# Altium PCB WEMOSD1R1_MATRIX64X32_RGB.PcbDoc
Units mil, origin at the board's own origin, x right, y up, seen from the top; angles counter-clockwise.
Board outline 2677.69 x 1693.44 mil, 2 copper layers (Top Layer, Bottom Layer); 6 components, 18 nets, 71 pads, 0 vias.
Unrouted connection lines stored in the file: 22.
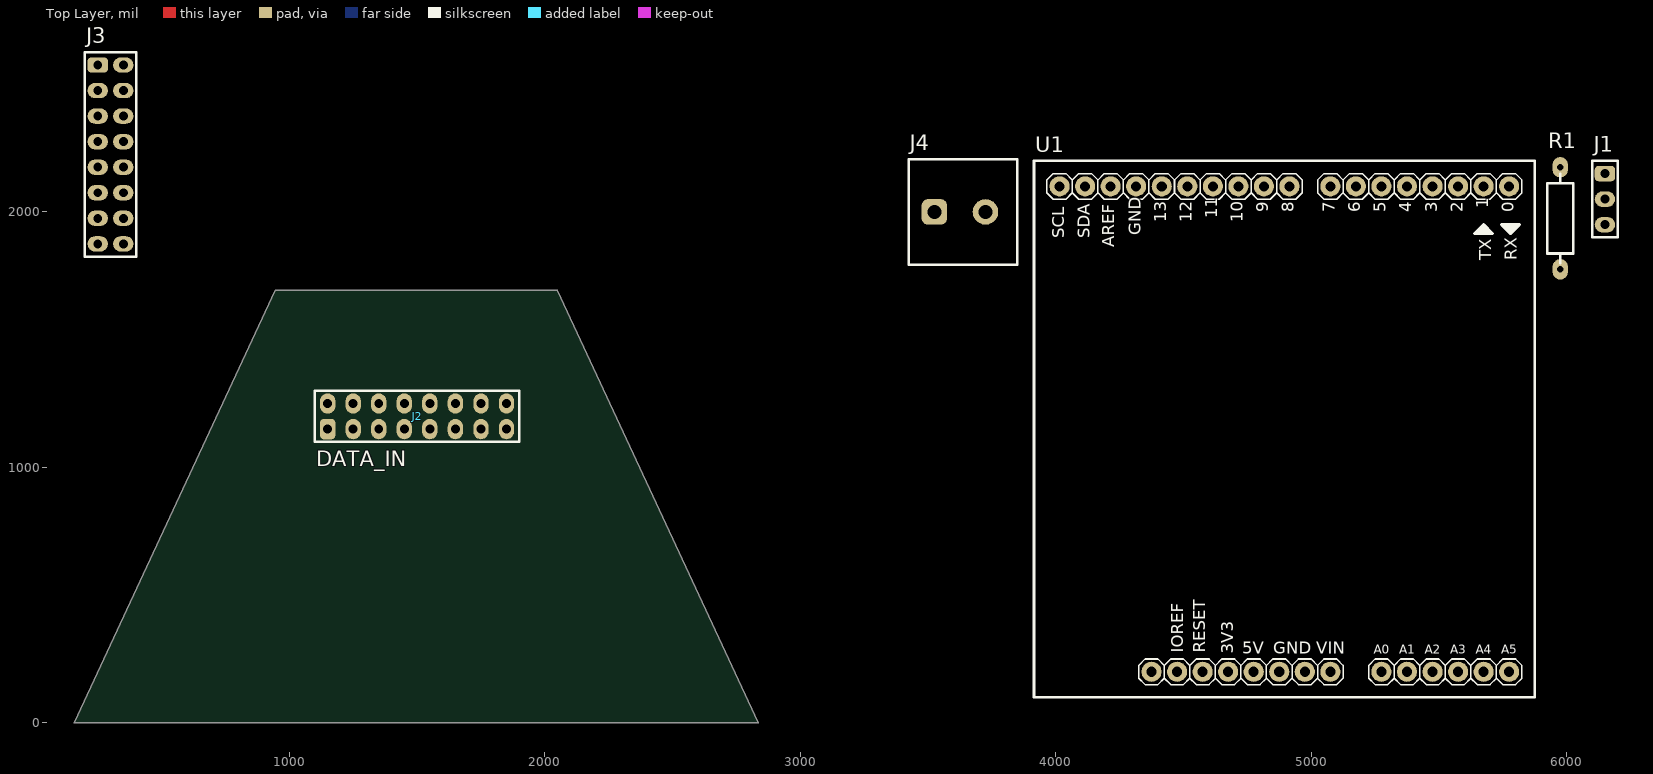
[diagram p0: Top Layer view]
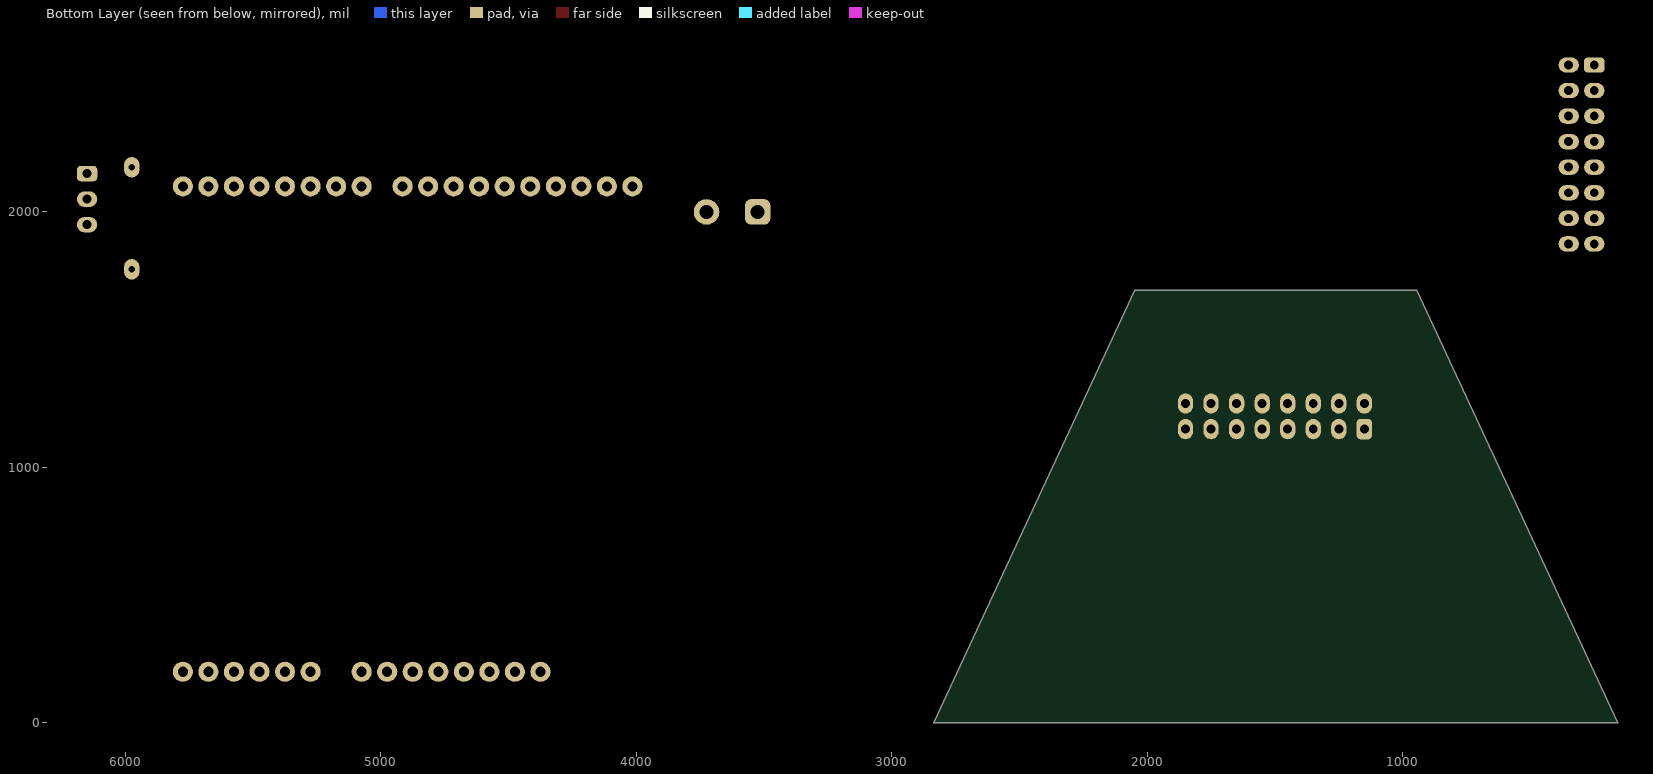
[diagram p1: Bottom Layer view, seen from below]

## Layer stack, top to bottom
Top Solder: solder mask 0.4, Solder Resist, Dk 3.5
Top Layer: signal copper 1.4
Dielectric 1: dielectric 12.6, FR-4, Dk 4.8
Bottom Layer: signal copper 1.4
Bottom Solder: solder mask 0.4, Solder Resist, Dk 3.5

## Board outline
158.13,0.36 ccw(c158.37,0.25) 158.37,-0.01 2835.54,-0.01 ccw(c2835.54,0.25) 2835.8,0.25 ccw(c2835.54,0.25) 2835.78,0.36 2048.38,1693.28 ccw(c2048.14,1693.16) 2048.14,1693.43 945.78,1693.43 ccw(c945.78,1693.16) 945.54,1693.28

## Design rules (kind name [scope] priority, off if disabled: settings)
Clearance [All] p1: gap=10 ignorepadtopadclearanceinfootprint=FALSE except(0: Arc-Hole Track-Hole SMDPad-Hole THPad-Hole Via-Hole Fill-Hole Poly-Hole Region-Hole Text-Hole)
PolygonConnect [All] p1: connectstyle=Relief reliefconductorwidth=10 reliefentries=4 polygonreliefangle="90 Angle" airgapwidth=10
RoutingVias [All] p1: holewidth=28 width=50 viastyle="Through Hole" minholewidth=28 minwidth=50 maxholewidth=28 maxwidth=50
SolderMaskExpansion [All] p1: expansion=4 istentingtop=FALSE
Width [All] p1: maxlimit=10 minlimit=10 preferedwidth=10
30 further rules are at their usual default settings.

## Components (designator, comment, footprint, x,y, rotation, side; value= is the part's Value field where it differs from the comment)
J1 "DTH11" "Header 3x1 TH Pitch 2.54mm" 6150,2050 r0 top
J2 "DATA_IN" "Header 8x2 TH Pitch 2.54mm" 1500,1200 r90 top
J3 "DATA_OUT" "Header 8x2 TH Pitch 2.54mm" 300,2225 r0 top
J4 "KF28_2" HEADER_KF128_2_5.08MM 3625,2000 r0 top
R1 "10K" RES-0.25W-H-MF 5975,1975 r90 top
U1 "ArduinoUno" ARDUINO_UNO_PIN_PACK 5775,2100 r0 top

## Footprints (in the part's own frame and the unit in brackets; to place one, negate y for a bottom-side part, rotate by r counter-clockwise, add the part's x,y. Pads: shape width x height; smd on the part's side, far side on the other; paste and mask are expansions set on the pad)
ARDUINO_UNO_PIN_PACK [mm]
  round 2 hole 1: 1(-35.56,-48.26) 2(-33.02,-48.26) 3(-30.48,-48.26) 4(-27.94,-48.26) 5(-25.4,-48.26) 6(-22.86,-48.26) 7(-20.32,-48.26) 8(-17.78,-48.26) 9(-12.7,-48.26) 10(-10.16,-48.26) 11(-7.62,-48.26) 12(-5.08,-48.26) 13(-2.54,-48.26) 14(0,-48.26) 15(0,0) 16(-2.54,0) 17(-5.08,0) 18(-7.62,0) 19(-10.16,0) 20(-12.7,0) 21(-15.24,0) 22(-17.78,0) 23(-21.844,0) 24(-24.384,0) 25(-26.924,0) 26(-29.464,0) 27(-32.004,0) 28(-34.544,0) 29(-37.084,0) 30(-39.624,0) 31(-42.164,0) 33(-44.704,0)
  silkscreen extent -47.24,-50.8 2.54,2.54
"Header 3x1 TH Pitch 2.54mm" [mil]
  rrect50% 80x60 hole 35: 1(0,100)
  oval 80x60 hole 35: 2(0,0) 3(0,-100)
  silkscreen extent -50,-150 50,150, body extent -50,-150 50,150, height 350
"Header 8x2 TH Pitch 2.54mm" [mil]
  rrect50% 80x60 hole 35: 1(-50,350)
  oval 80x60 hole 35: 2(50,350) 3(-50,250) 4(50,250) 5(-50,150) 6(50,150) 7(-50,50) 8(50,50) 9(-50,-50) 10(50,-50) 11(-50,-150) 12(50,-150) 13(-50,-250) 14(50,-250) 15(-50,-350) 16(50,-350)
  silkscreen extent -100,-400 100,400, body extent -100,-400 100,400, height 350
HEADER_KF128_2_5.08MM [mil]
  rrect50% 100x100 hole 55: 1(-100,0)
  round 100 hole 55: 2(100,0)
  silkscreen extent -200,-207 224,207, body extent -200,-207 224,207, height 563
RES-0.25W-H-MF [mil]
  oval 80x60 hole 25: 1(-199.8,0) 2(199.8,0.01)
  silkscreen extent -175,-51 175,51, body extent -211,-51 211,51, height 106

## Part data
J1: library part "Header 3x1 TH Pitch 2.54mm"
J2 J3: library part "Header 8x2 TH Pitch 2.54mm"
J4: library part HEADER_KF128_2_5.08MM
R1: library part "Resistors THD"

## Nets (pads, with @x,y where several pads share a name; then routed paths per layer and width w, separated by ;. In a path a pad name is that pad's centre, name@x,y a point inside that pad or via, vN(x,y) a via of type N, cw(c..) or ccw(c..) an arc to the next point about the centre after c; other vN are vias at no path point)
+5: J4.1 U1.5
GND: J1.1 J4.2 U1.6 U1.7
NetJ1_2: J1.2 R1.1 U1.18
NetJ2_1: J2.1 U1.22
NetJ2_2: J2.2 J3.5
NetJ2_3: J2.3 J3.6
NetJ2_5: J2.5 J3.1
NetJ2_6: J2.6 J3.2
NetJ2_7: J2.7 J3.3
NetJ2_9: J2.9 U1.16
NetJ2_10: J2.10 U1.17
NetJ2_11: J2.11 U1.23
NetJ2_12: J2.12 U1.21
NetJ2_13: J2.13 U1.20
NetJ2_14: J2.14 U1.15
NetJ2_15: J2.15 U1.19
NetJ2_16: J2.16 U1.29
VCC: J1.3 R1.2 U1.4
pads on no net: J2.4 J2.8 J3.4 J3.7 J3.8 J3.9 J3.10 J3.11 J3.12 J3.13 J3.14 J3.15 J3.16 U1.1 U1.2 U1.3 U1.8 U1.9 U1.10 U1.11 U1.12 U1.13 U1.14 U1.24 U1.25 U1.26 U1.27 U1.28 U1.30 U1.31 U1.33

## Silkscreen, mask and mechanical layers (free items; w line width, h text height)
Mechanical 1:
  lines w0.5: 945.78,1693.16 158.37,0.25 2835.54,0.25 2048.14,1693.16 ; 945.78,1693.16 1496.96,1693.16 ; 945.78,1693.16 1496.96,1693.16 ; 1496.96,1693.16 2048.14,1693.16 ; 1496.96,1693.16 2048.14,1693.16 ; 1496.96,1693.16 2048.14,1693.16

## Text inside footprints (layer, text, board x,y; h text height)
U1: Top Overlay "5V" at 4730,270 h47.6; Top Overlay "A0" at 5244,271 h34; Top Overlay "AREF" at 4229.58,1861.52 h47.6 r90; Top Overlay "GND" at 4333.58,1908.11 h47.6 r90; Top Overlay "RESET" at 4585,275 h47.6 r90; Top Overlay "3V3" at 4695,270 h47.6 r90; Top Overlay "A1" at 5344,271 h34; Top Overlay "A2" at 5444,271 h34; Top Overlay "A3" at 5544,271 h34; Top Overlay "A4" at 5644,271 h34; Top Overlay "A5" at 5744,271 h34; Top Overlay "VIN" at 5020,270 h47.6; Top Overlay "GND" at 4851,270 h47.6; Top Overlay "IOREF" at 4500,275 h47.6 r90; Top Overlay "TX" at 5705,1811 h47.6 r90; Top Overlay "RX" at 5805,1810 h47.6 r90; Top Overlay "13" at 4432.58,1958.62 h47.6 r90; Top Overlay "12" at 4532.58,1958.62 h47.6 r90; Top Overlay "11" at 4632.58,1974.48 h47.6 r90; Top Overlay "10" at 4732.58,1958.62 h47.6 r90; Top Overlay "9" at 4832.58,1998.28 h47.6 r90; Top Overlay "8" at 4932.58,1998.28 h47.6 r90; Top Overlay "7" at 5092.58,1998.28 h47.6 r90; Top Overlay "6" at 5192.58,1998.28 h47.6 r90; Top Overlay "5" at 5292.58,1998.28 h47.6 r90; Top Overlay "4" at 5392.58,1998.28 h47.6 r90; Top Overlay "3" at 5492.58,1998.28 h47.6 r90; Top Overlay "2" at 5592.58,1998.28 h47.6 r90; Top Overlay "1" at 5692.58,2014.14 h47.6 r90; Top Overlay "0" at 5792.58,1998.28 h47.6 r90; Top Overlay "SCL" at 4033.27,1896.85 h47.6 r90; Top Overlay "SDA" at 4132.82,1896.34 h47.6 r90